# Altium PCB ESP-OLED.PcbDoc
Units mm, origin at the board's own origin, x right, y up, seen from the top; angles counter-clockwise.
Board outline 31.12 x 14.99 mm, 2 copper layers (Top Layer, Bottom Layer); 11 components, 12 nets, 63 pads, 0 vias.
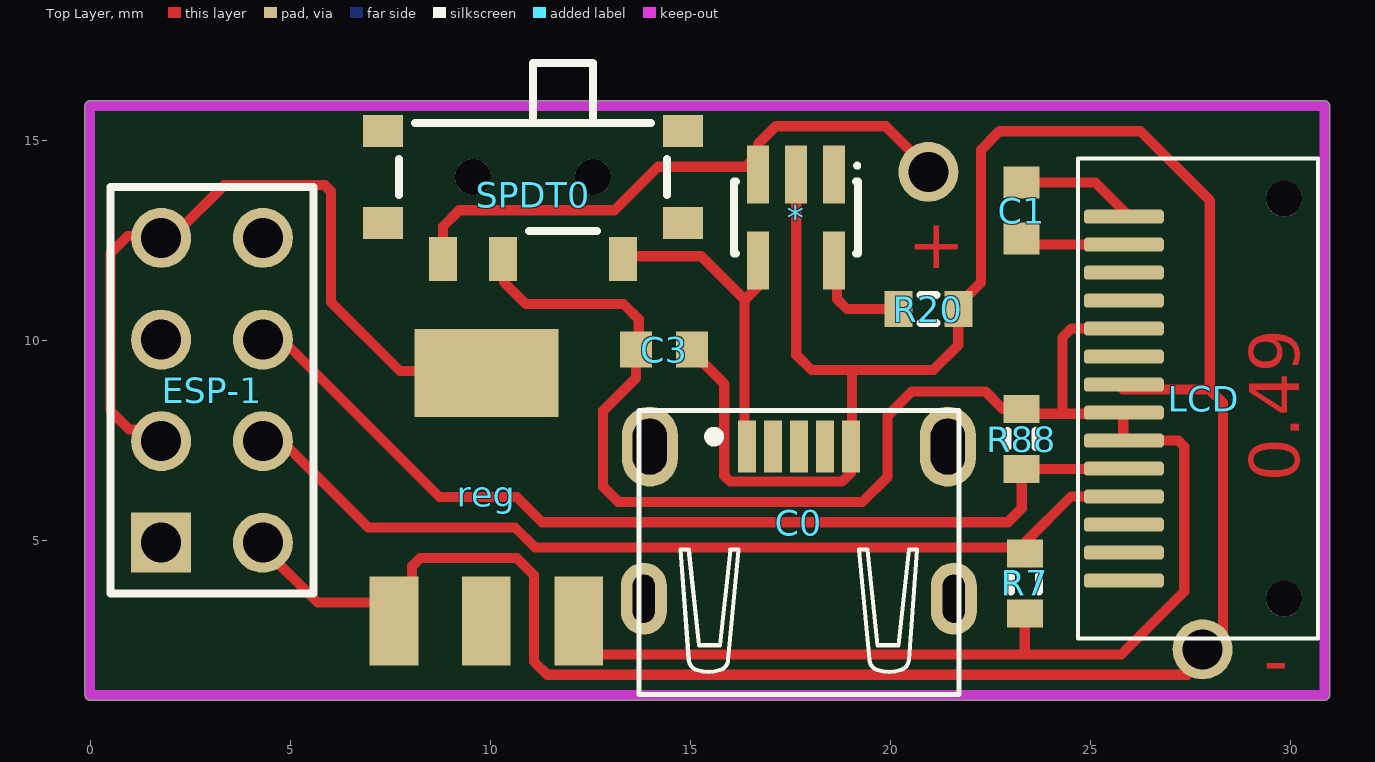
[diagram p0: Top Layer view]
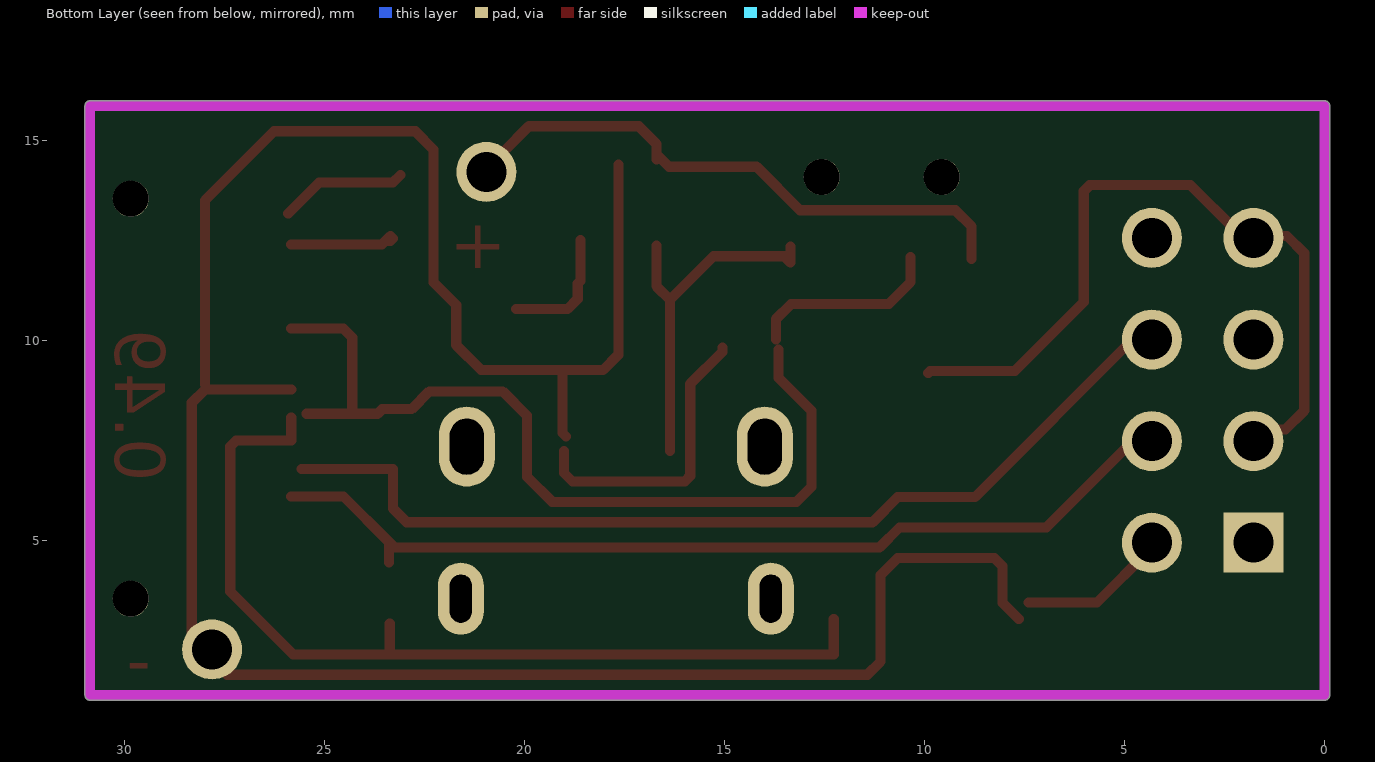
[diagram p1: Bottom Layer view, seen from below]

## Layer stack, top to bottom
Top Solder: solder mask 0.0102, Solder Resist, Dk 3.5
Top Layer: signal copper 0.0356
Dielectric 1: dielectric 0.32, FR-4, Dk 4.8
Bottom Layer: signal copper 0.0356
Bottom Solder: solder mask 0.0102, Solder Resist, Dk 3.5

## Board outline
0,1.016 cw(c0,1.143) -0.127,1.143 -0.127,15.875 cw(c0,15.875) 0,16.002 30.861,16.002 cw(c30.861,15.875) 30.988,15.875 30.988,1.143 cw(c30.861,1.143) 30.861,1.016

## Design rules (kind name [scope] priority, off if disabled: settings)
Clearance [All] p1: gap=0.254 ignorepadtopadclearanceinfootprint=FALSE except(0: Arc-SMDPad Track-SMDPad SMDPad-SMDPad)
ComponentClearance [All] p1: gap=0 collisioncheckmode=3 verticalgap=0 showdistances=FALSE
PolygonConnect [All] p1: connectstyle=Relief reliefconductorwidth=0.254 reliefentries=4 polygonreliefangle="90 Angle" airgapwidth=0.254
RoutingVias [All] p1: holewidth=0.711 width=1.27 viastyle="Through Hole" minholewidth=0.711 minwidth=1.27 maxholewidth=0.711 maxwidth=1.27
SolderMaskExpansion [All] p1: expansion=0.102
Width [All] p1: maxlimit=1 minlimit=0.254 preferedwidth=0.254 minimp=50.000000 maximp=50.000000 favimp=50.000000
29 further rules are at their usual default settings.

## Components (designator, comment, footprint, x,y, rotation, side; value= is the part's Value field where it differs from the comment)
* "LTC4054-4.2" S5 17.653,13.081 r180 top
C0 "WR-Communication Connectors 629105150521" 629105150521_no_fixtures 17.718,7.356 r0 top
C1 "Cap Semi" 1608[0603] 23.291,13.258 r90 top value=1uF
C3 "Cap Semi" 1608[0603] 14.351,9.779 r180 top value=4.7uF
ESP-1 "Header 4X2" ESP-01 0.508,3.683 r0 top
LCD "Header 14" OLED0.49 25.845,13.106 r270 top
R7 "Res3" J1-0603 23.368,3.937 r270 top value=10K
R20 "Res3" J1-0603 20.955,10.795 r0 top value=3.3k
R88 "Res3" J1-0603 23.291,7.543 r90 top value=10K
reg "AMS1117-3.3" SOT223 9.906,6.096 r90 top
SPDT0 "450404015514" 450404015514 11.073,14.097 r0 top

## Footprints (in the part's own frame and the unit in brackets; to place one, negate y for a bottom-side part, rotate by r counter-clockwise, add the part's x,y. Pads: shape width x height; smd on the part's side, far side on the other; paste and mask are expansions set on the pad)
1608[0603] [mm] "Chip Capacitor, Body 1.6x0.8mm, IPC High Density"
  rect 0.8x0.9 smd: 1(-0.7,0) 2(0.7,0)
  body extent -0.87,-0.48 0.87,0.48, height 1.3
450404015514 [mm] "Right angle Slide Switch"
  rect 0.7x1.1 smd: 1(2.25,-2.05) 2(-0.75,-2.05) 3(-2.25,-2.05)
  round 0.9 hole 0.9 unplated: M1(-1.5,0) M2(1.5,0)
  rect 1x0.8 smd: M3(-3.75,1.15) M4(3.75,1.15) M5(-3.75,-1.15) M6(3.75,-1.15)
  silkscreen extent -3.35,-1.35 3.35,2.85, body extent -3.85,-2.25 3.85,2.88, height 1.4
629105150521_no_fixtures [mm] "WR-COM_USB_Micro Type B_Horizontal_SMT Micro Type B Horizontal SMT - 3A current at Pin1 & Pin 5 - with Pegs and THT shielding Pins  - T&R Packaging"
  rect 0.45x1.3 smd: 1(-1.3,0) 2(-0.65,0) 3(0,0) 4(0.65,0) 5(1.3,0)
  oval 1.4x2 hole 0.85 slot 1.4 at 90 deg: Z1(-3.725,0) Z2(3.725,0)
  oval 1.15x1.8 hole 0.55 slot 1.2 at 90 deg: Z4(-3.875,-3.8) Z4(3.875,-3.8)
  silkscreen extent -4,-6.2 4,0.9, body extent -4,-6.25 4,0.35, height 2.67
ESP-01 [mm]
  rect 1.5x1.5 hole 1: 1(1.27,1.27)
  round 1.5 hole 1: 2(3.81,1.27) 3(1.27,3.81) 4(3.81,3.81) 5(1.27,6.35) 6(3.81,6.35) 7(1.27,8.89) 8(3.81,8.89)
  silkscreen extent 0,0 5.08,10.16, body extent -0.25,-2.54 24.55,12.34, height 11.5
J1-0603 [mm] "Chip Resistor, Body 1.6x0.8mm, IPC High Density"
  rect 0.7x0.9 smd: 1(-0.75,0) 2(0.75,0)
  silkscreen extent -0.2,-0.35 0.2,0.35, body extent -0.85,-0.48 0.85,0.48, height 0.9
OLED0.49 [mm]
  rrect50% 0.35x2 smd: 1(0,0) 2(0.7,0) 3(1.4,0) 4(2.1,0) 5(2.8,0) 6(3.5,0) 7(4.2,0) 8(4.9,0) 9(5.6,0) 10(6.3,0) 11(7,0) 12(7.7,0) 13(8.4,0) 14(9.1,0)
  round 0.9 hole 0.9 unplated: 6(-0.45,4) 6(9.55,4)
  silkscreen extent -1.45,-1.14 10.55,4.86, body extent -2.18,-3.3 11.32,8.08, height 0.31
S5 [mm] "SOT-23/SC-74A; 5 Leads; Body 3.1 x 3 mm, inc. leads (LxW max)"
  rect 0.55x1.45 smd: 1(-0.95,-1.075) 2(0,-1.075) 3(0.95,-1.075) 4(0.95,1.075) 5(-0.95,1.075)
  silkscreen extent -1.58,-1.35 1.55,0.9
SOT223 [mil]
  rect 88x48 smd: 1(-122,91) 2(-122,0) 3(-122,-91)
  rect 86.61x141.73 smd: 2(122.01,0)

## Part data
C0: "WR-COM_USB_Micro Type B_Horizontal_SMT", Manufacturer="Würth Elektronik eiSos GmbH", partNo=629105150521, ComponentLink1 Description=Manufacturer, ComponentLink1URL=http://www.we-online.de, ComponentLink2 Description=Datasheet, ComponentLink2URL=http://katalog.we-online.de/em/datasheet/629105150521.pdf, Created by="Karrer Zheng", Created Date=10/21/2014, NoPins=5
C1 C3: "Capacitor (Semiconductor SIM Model)", LatestRevisionDate=29-May-2009, LatestRevisionNote="IPC-7351 Footprint Added.", PackageDescription="Chip Capacitor", PackageReference=C1206, Published=8-Jun-2000, Publisher="Altium Limited"
ESP-1: "Header, 4-Pin, Dual row", LatestRevisionDate=17-Jul-2002, LatestRevisionNote="Re-released for DXP Platform.", Publisher="Altium Limited"
LCD: "Header, 14-Pin", LatestRevisionDate=17-Jul-2002, LatestRevisionNote="Re-released for DXP Platform.", Publisher="Altium Limited"
R7 R20 R88: "Resistor", LatestRevisionDate=29-May-2009, LatestRevisionNote="IPC-7351 Footprint Added.", PackageDescription="Chip Resistor", PackageReference=J1-0603, Published=8-Jun-2000, Publisher="Altium Limited"
SPDT0: "WS-SLSU Mini SMT Slide Switch, Same Side Connection, Right Angled, SPDT", Operating Temperature="-40 to +85degC", Rated Current=300mA, Rated Voltage=5VDC, Circuit=SPDT, ComponentLink1Description=Manufacturer, ComponentLink1URL=http://www.we-online.de, ComponentLink2Description=Datasheet, ComponentLink2URL=https://katalog.we-online.com/em/datasheet/450404015514.pdf, Contact Material="Copper Alloy", Contact Plating=Silver, Mounting Technology=SMT, Packaging="Tape and Reel", Part Number=450404015514, Published Date="September 2019", Publisher="Wurth Elektronik", Size=6.7x2.7mm, Switching Function=On-On, Terminal Material="Copper Alloy", Terminal Plating=Silver

## Free pads (board coordinates)
  round 1.5 hole 1: 5(20.955,14.224) 5(27.813,2.286)

## Nets (pads, with @x,y where several pads share a name; then routed paths per layer and width w, separated by ;. In a path a pad name is that pad's centre, name@x,y a point inside that pad or via, vN(x,y) a via of type N, cw(c..) or ccw(c..) an arc to the next point about the centre after c; other vN are vias at no path point)
+5: C3.2 LCD.5 LCD.8 LCD.9 R7.2 R88.2 reg.3 SPDT0.2 | length 50.5
  Top Layer w0.254: SPDT0.2@10.349,12.097 10.349,11.468 10.895,10.922 13.335,10.922 13.716,10.541 C3.2@13.716,10.033 ; reg.3@12.267,3.047 12.267,2.159 23.368,2.159 ; C3.2 13.651,9.079 12.827,8.255 12.827,6.35 13.202,5.975 19.31,5.975 19.939,6.604 19.939,8.128 20.548,8.737 22.378,8.737 22.822,8.293 R88.2 23.557,8.293 23.672,8.178 24.307,8.178 ; R7.2@23.368,2.933 23.368,2.159 ; LCD.8@25.45,8.178 24.307,8.178 ; LCD.9@25.831,7.506 LCD.8@25.831,8.082 ; LCD.9@25.831,7.633 25.831,7.509 25.972,7.509 27.206,7.509 27.355,7.36 27.355,3.733 25.781,2.159 23.368,2.159 ; LCD.5@25.831,10.309 24.533,10.309 24.307,10.083 24.307,8.178
BAT: *.3 pad.5@20.955,14.224 SPDT0.3 | length 14.9
  Top Layer w0.254: SPDT0.3 8.823,12.86 9.229,13.266 13.112,13.266 14.197,14.351 16.39,14.351 16.703,14.664 16.703,14.537 16.703,14.925 17.145,15.367 19.891,15.367 20.526,14.732 pad.5@20.955,14.224
GND: *.2 C0.5 C3.1 ESP-1.2 LCD.7 pad.5@27.813,2.286 R20.2 reg.1 | length 74.3
  Top Layer w0.254: ESP-1.2@4.368,4.781 5.689,3.461 reg.1@7.398,3.461 ; reg.1@7.645,3.047 8.051,3.454 8.051,4.368 8.255,4.572 10.668,4.572 11.099,4.141 11.099,1.982 11.43,1.651 27.432,1.651 pad.5@28.003,2.222 ; C3.1@15.051,9.829 C3.1 15.051,9.729 15.855,8.925 15.855,6.624 15.996,6.483 18.802,6.483 19.015,6.696 C0.5@19.015,7.246 ; *.2@17.653,14.41 *.2 17.653,9.652 18.034,9.271 19.05,9.271 ; C0.5@18.963,7.61 19.05,7.697 19.05,9.271 ; LCD.7@25.831,8.782 27.99,8.782 ; LCD.7@25.972,8.782 27.99,8.782 ; 27.99,8.909 27.99,13.512 26.262,15.24 22.733,15.24 22.275,14.782 22.275,11.465 21.705,10.895 R20.2 21.705,9.894 21.082,9.271 19.05,9.271 ; pad.5@28.003,2.095 28.194,2.286 27.813,2.286 28.158,2.332 28.321,2.461 28.321,8.451 27.99,8.782
Net*_4: *.4 C0.1 SPDT0.1 | length 9.3
  Top Layer w0.254: SPDT0.1@13.349,12.351 13.349,11.957 13.507,12.115 15.277,12.115 16.363,11.029 ; C0.1@16.363,7.246 16.363,11.029 ; *.4 *.4@16.703,12.387 ; *.4@16.703,12.133 16.703,11.369 16.363,11.029
Net*_5: *.5 R20.1 | length 3.1
  Top Layer w0.254: *.5@18.603,12.514 *.5 18.603,11.496 18.669,11.43 18.669,11.049 18.923,10.795 R20.1
NetC1_1: C1.1 LCD.2 | length 2.8
  Top Layer w0.254: C1.1 23.353,12.496 C1.1@23.48,12.496 ; C1.1@23.353,12.623 C1.1@23.48,12.496 ; LCD.2@25.831,12.409 23.567,12.409 C1.1@23.48,12.496
NetC1_2: C1.2 LCD.1 | length 3.2
  Top Layer w0.254: C1.2@23.102,14.147 C1.2 25.131,13.958 LCD.1@25.905,13.184
RX: ESP-1.8
SCL: ESP-1.6 LCD.10 R88.1 | length 23.9
  Top Layer w0.254: ESP-1.6@4.749,10.083 8.736,6.096 10.668,6.096 11.297,5.467 22.945,5.467 23.291,5.813 R88.1 LCD.10@25.577,6.793
SDA: ESP-1.4 LCD.11 R7.1 | length 23.2
  Top Layer w0.254: ESP-1.4@4.749,7.543 6.958,5.334 10.624,5.334 11.121,4.837 23.252,4.837 R7.1@23.391,4.976 ; R7.1@23.391,4.456 R7.1@23.391,4.976 ; LCD.11@25.831,6.109 24.524,6.109 R7.1@23.391,4.976
TX: ESP-1.1
VCC: ESP-1.3 ESP-1.7 reg.2 | length 19.7
  Top Layer w0.254: ESP-1.3@2.209,7.543 1.967,7.785 0.978,7.785 0.508,8.255 0.508,12.192 0.939,12.623 2.209,12.623 2.209,12.75 3.352,13.893 5.87,13.893 6.019,13.744 6.019,10.972 7.746,9.245 9.856,9.245 reg.2@9.906,9.195
pads on no net: *.1 C0.2 C0.3 C0.4 C0.Z1 C0.Z2 C0.Z4 ESP-1.5 LCD.3 LCD.4 LCD.6 LCD.12 LCD.13 LCD.14 SPDT0.M1 SPDT0.M2 SPDT0.M3 SPDT0.M4 SPDT0.M5 SPDT0.M6

## Keep-outs
Keep-Out Layer:
  lines w0.254: 0,1.143 0,15.875 30.861,15.875 30.861,1.143 0,1.143

## Other copper
Top Layer:
  text "+" at 20.447,11.811 h1.25
  text "0.49" at 30.226,6.477 h1.25 r90
  text "-" at 29.337,1.397 h1.25

## Silkscreen, mask and mechanical layers (free items; w line width, h text height)
Top Solder:
  text "+" at 20.447,11.811 h1.25
  text "0.49" at 30.226,6.477 h1.25 r90
  text "-" at 29.337,1.397 h1.25